# EAGLE board SerialAdapter (EAGLE 5.11)
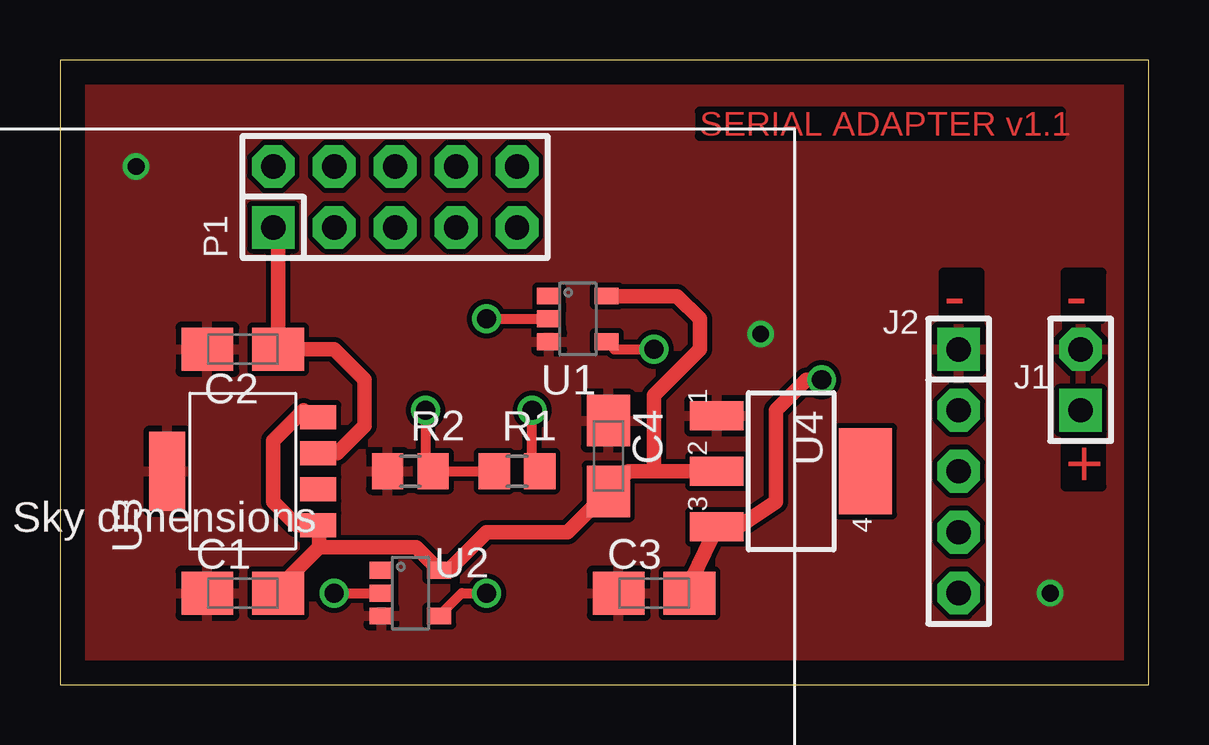
[diagram p0: board, top side]
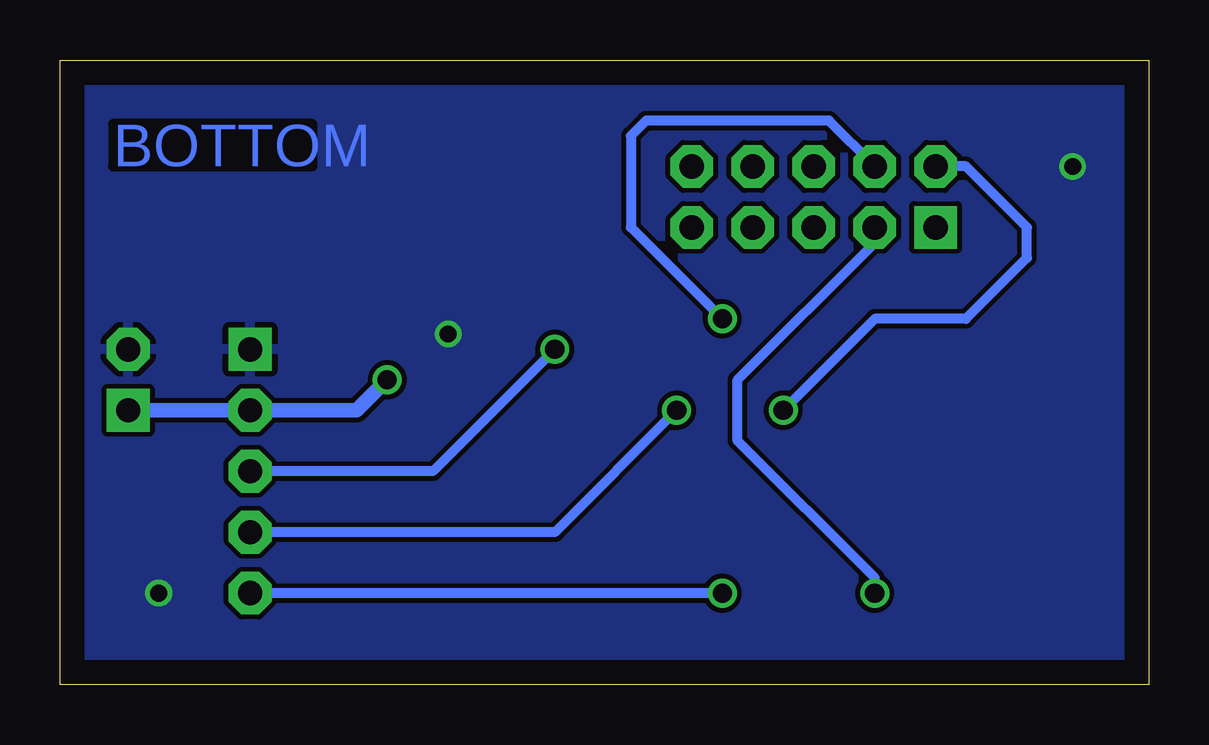
[diagram p1: board, bottom side, seen from below]

Size 45.39 x 26.02 mm. Coordinates in mm from the lower left corner, seen from the top.
Outline: 0,0 45.39,0 45.39,26.02 0,26.02 0,0
Copper layers (1*16): Top 0.035mm / dielectric 1.5mm / Bottom 0.035mm
Design rules "default *": minimum track width 10mil, minimum drill 24mil, track to track 8mil, track to pad 8mil, pad to pad 8mil, via to via 8mil, smd to smd 8mil, copper to edge 40mil, drill to drill 8mil, minimum pad ring 10mil, minimum via ring 8mil, stop-mask expansion 4mil, vias tented up to drill 0mil, thermal gap 10mil

## Footprints (pad centres in the part's own frame; a part is rotated, then mirrored left to right if it is on the bottom)
A/3216-18W = smd 2.15 x 1.8: + 1.475,0; - -1.475,0
SIP-100-02-40 = drill 1.016 pad 1.778 square: 1 -1.27,0 | drill 1.016 pad 1.778 octagon: 2 1.27,0
SIP-100-05-40 = drill 1.016 pad 1.778 square: 1 -5.08,0 | drill 1.016 pad 1.778 octagon: 2 -2.54,0; 3 0,0; 4 2.54,0; 5 5.08,0
TMOTE_BIGHDR = drill 1.016 pad 1.778 square: 1 -1.27,1.27 | drill 1.016 pad 1.778 octagon: 2 -1.27,3.81; 3 1.27,1.27; 4 1.27,3.81; 5 3.81,1.27; 6 3.81,3.81; 7 6.35,1.27; 8 6.35,3.81; 9 8.89,1.27; 10 8.89,3.81
R0805 = smd 1.3 x 1.5: 1 -0.95,0; 2 0.95,0
TSOP5 = smd 0.7 x 1: 1 0.95,1.2; 2 0,1.2; 3 -0.95,1.2; 4 -0.95,-1.2; 5 0.95,-1.2
SOT223-5 = smd 1 x 1.5: 1 -2.25,-3.15; 2 -0.75,-3.15; 3 0.75,-3.15; 4 2.25,-3.15 | smd 3.3 x 1.5: 5 0,3.15
SOT223 = smd 1.219 x 2.235: 1 -2.311,-3.099; 2 0,-3.099; 3 2.311,-3.099 | smd 3.6 x 2.2: 4 0,3.099

## Placement (x,y rotation side)
C1  1u  [A/3216-18W]  7.62,3.81 0 top
C2  1u  [A/3216-18W]  7.62,13.97 0 top
C3  10u  [A/3216-18W]  24.77,3.81 0 top
C4  22u  [A/3216-18W]  22.86,9.53 270 top
J1  F-1X02-SIP-100-40  [SIP-100-02-40]  42.55,12.7 90 top
J2  F-1X05-SIP-100-40  [SIP-100-05-40]  37.47,8.89 270 top
P1  TMOTE_SKY_BIGHDR  [TMOTE_BIGHDR]  10.16,17.78 0 top
R1  10k  [R0805]  19.05,8.89 0 top
R2  16k  [R0805]  14.61,8.89 0 top
U1  MC74VHC1GT50DT  [TSOP5]  21.59,15.24 90 top
U2  MC74VHC1GT50DT  [TSOP5]  14.61,3.81 90 top
U3  LP38692MP  [SOT223-5]  7.62,8.89 90 top
U4  AP1117E50G-13  [SOT223]  30.48,8.89 270 top

## Library data of the parts
C1-C4 R1 R2 = rcl
J1 J2 = con-headers-jp
P1 U1 U2 U4 = oli
U3 = linear1

## Nets
GND: C1.- C2.- C3.- C4.- J1.2 J2.1 R2.1 U1.3 U2.3 U3.5 U4.1
N$1: P1.4 U1.2
N$3: P1.3 U2.2
N$4: J2.3 U1.4
N$5: P1.2 R1.1 R2.2
N$6: J2.5 U2.4
N$7: C1.+ C4.+ U1.5 U2.5 U3.1 U3.4 U4.2
N$9: C2.+ P1.1 U3.3
N$10: J2.4 R1.2
VCC: C3.+ J1.1 J2.2 U4.3

## Tracks (layer width: path | path; a pad name or v marks a point on that pad's centre or on a via)
GND  (via drill 0.7)
  other vias: 29.21,14.61 41.27,3.81 3.17,21.59
  pour Top: 0,26.67 46.99,26.67 46.99,0 0,0
  pour Bottom: 0,26.67 46.99,26.67 46.99,0 0,0
N$1  (via drill 0.8)
  Top 0.406: v17.78,15.24 U1.2
  Bottom 0.406: P1.4 13.34,23.5 20.95,23.5 21.59,22.86 21.59,19.05 v17.78,15.24
N$3  (via drill 0.8)
  Top 0.406: v11.43,3.81 U2.2
  Bottom 0.406: v11.43,3.81 11.43,4.45 17.14,10.16 17.14,12.7 11.43,18.41 P1.3
N$4  (via drill 0.8)
  Top 0.406: v24.77,13.97 23.11,13.97 U1.4
  Bottom 0.406: J2.3 29.84,8.89 v24.77,13.97
N$5  (via drill 0.8)
  Top 0.406: R1.1 R2.2 15.24,9.21 v15.24,11.43
  Bottom 0.406: P1.2 7.62,21.59 5.08,19.05 5.08,17.78 7.62,15.24 11.43,15.24 v15.24,11.43
N$6  (via drill 0.8)
  Top 0.406: v17.78,3.81 16.74,3.81 U2.4
  Bottom 0.406: v17.78,3.81 J2.5
N$7
  Top 0.61: 24.77,8.89 23.7,8.89 C4.+ 21.16,6.35 17.78,6.35 16.19,4.76 U2.5 14.85,5.71 10.79,5.71 | 24.77,8.89 U4.2 | U1.5 25.72,16.19 26.67,15.24 26.67,13.97 24.77,12.06 24.77,8.89 | C1.+ 9.1,4.02 10.79,5.71 | 10.79,5.71 10.79,6.62 U3.1 9.87,6.64 8.89,7.62 8.89,10.16 10.16,11.43 10.45,11.14 U3.4
N$9
  Top 0.61: U3.3 11.54,9.64 12.7,10.79 12.7,12.7 11.43,13.97 C2.+ 9.1,18.84 P1.1
N$10  (via drill 0.8)
  Top 0.406: 19.68,9.21 v19.68,11.43
  Top 0.61: R1.2 19.68,9.21
  Bottom 0.406: J2.4 24.77,6.35 v19.68,11.43
VCC  (via drill 0.8)
  Top 0.61: v31.75,12.7 31.11,12.7 29.84,11.43 29.84,7.62 27.94,6.35 27.61,6.35 U4.3 26.11,3.94 C3.+
  Bottom 0.61: J1.1 J2.2 33.02,11.43 v31.75,12.7

## Text on the board
Top: SERIAL ADAPTER v1.1 | - | - | +
Bottom: BOTTOM